# EAGLE board BRD1001-001-001-320 - Counting Registers (EAGLE 9.4.2)
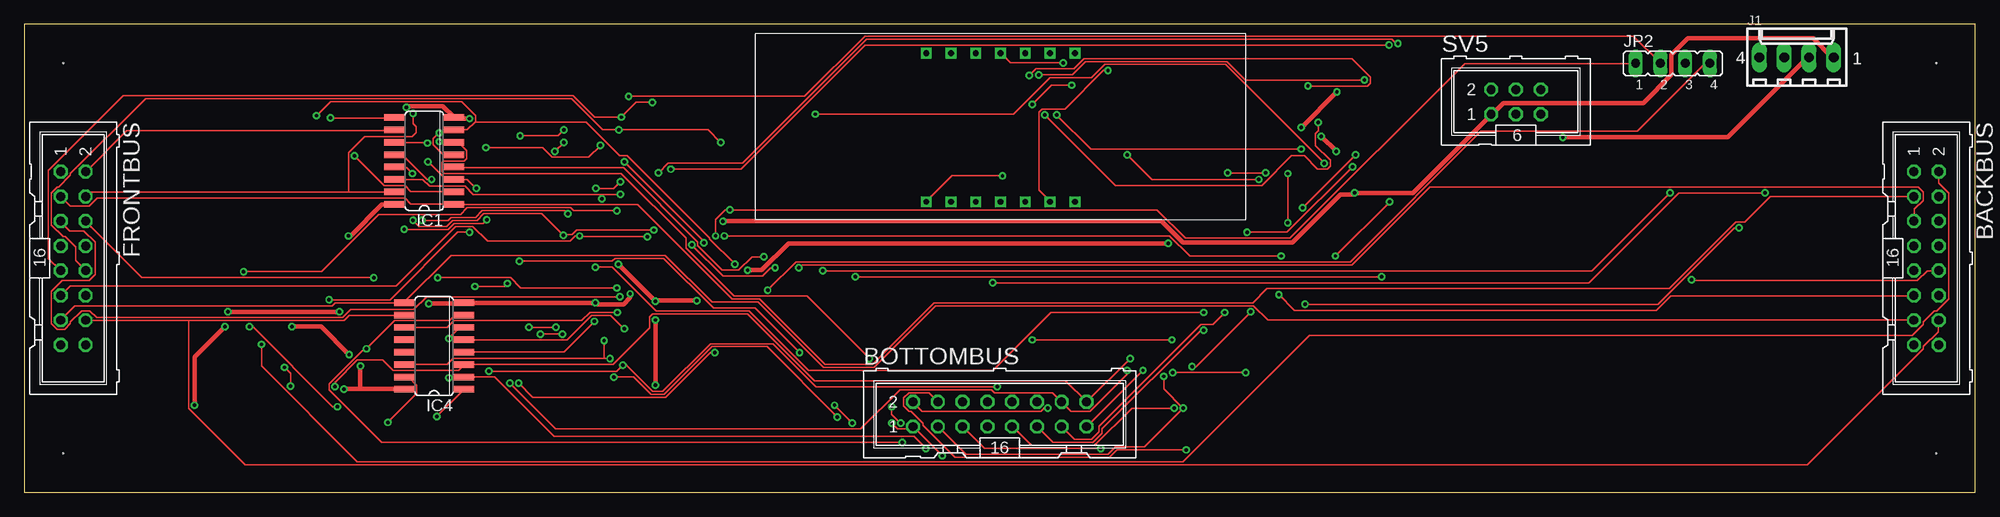
[diagram p0: board, top side]
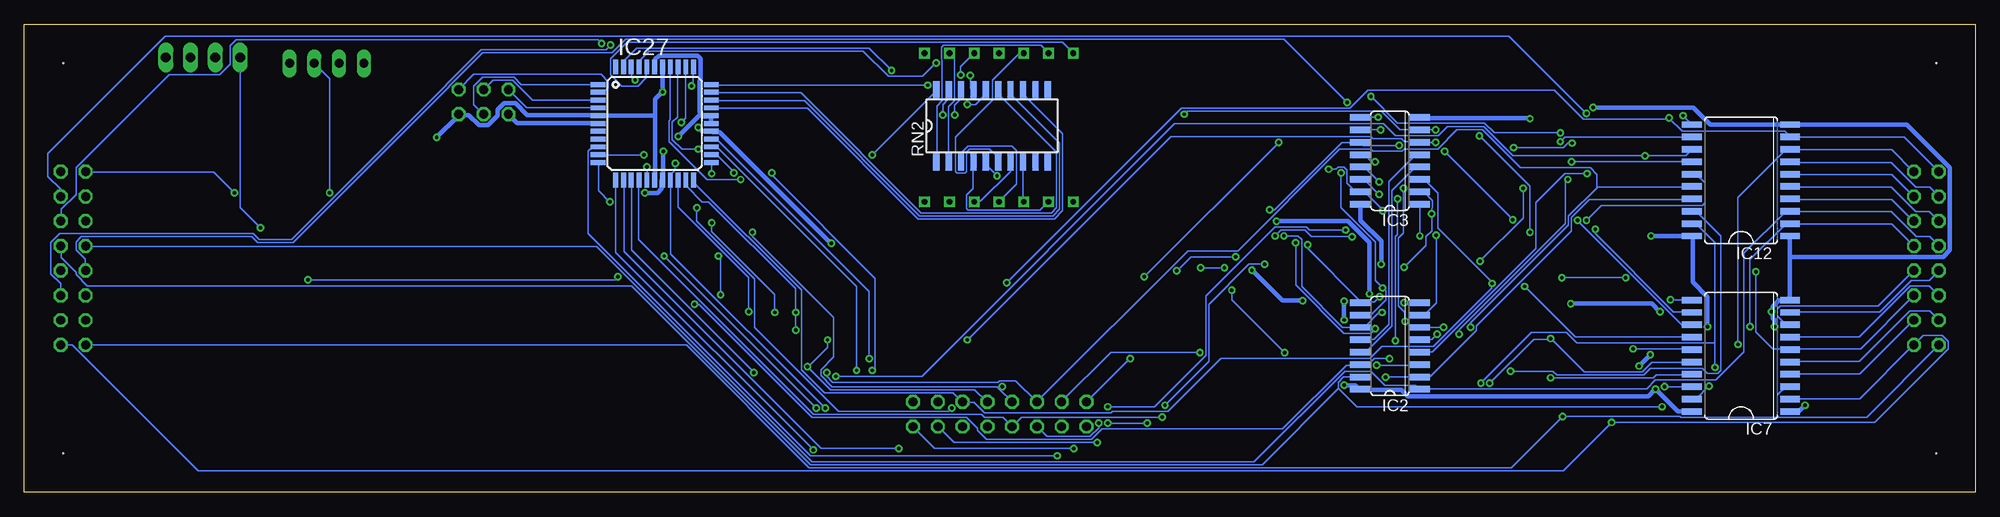
[diagram p1: board, bottom side, seen from below]

Size 200 x 48 mm. Coordinates in mm from the lower left corner, seen from the top.
Outline: 0,0 200,0 200,48 0,48 0,0
Copper layers (1*16): Top 0.035mm / dielectric 1.5mm / Bottom 0.035mm
Design rules "default": minimum track width 6mil, minimum drill 0.35mm, track to track 6mil, track to pad 6mil, pad to pad 6mil, via to via 6mil, smd to smd 6mil, copper to edge 40mil, drill to drill 6mil, minimum pad ring 10mil, minimum via ring 8mil, stop-mask expansion 4mil, vias tented up to drill 0mil, thermal gap 10mil
Net classes: 1 power: width 0.457 mm
Holes 0.12 mm at 4,4 196,44 4,44 196,4

## Footprints (pad centres in the part's own frame; a part is rotated, then mirrored left to right if it is on the bottom)
ML16 = drill 0.914 octagon: 1 -8.89,-1.27; 2 -8.89,1.27; 3 -6.35,-1.27; 4 -6.35,1.27; 5 -3.81,-1.27; 6 -3.81,1.27; 7 -1.27,-1.27; 8 -1.27,1.27; 9 1.27,-1.27; 10 1.27,1.27; 11 3.81,-1.27; 12 3.81,1.27; 13 6.35,-1.27; 14 6.35,1.27; 15 8.89,-1.27; 16 8.89,1.27
SO16 = smd 0.66 x 2.032: 1 -4.445,-3.073; 2 -3.175,-3.073; 3 -1.905,-3.073; 4 -0.635,-3.073; 5 0.635,-3.073; 6 1.905,-3.073; 7 3.175,-3.073; 8 4.445,-3.073; 9 4.445,3.073; 10 3.175,3.073; 11 1.905,3.073; 12 0.635,3.073; 13 -0.635,3.073; 14 -1.905,3.073; 15 -3.175,3.073; 16 -4.445,3.073
SO20W = smd 0.66 x 2.032: 1 -5.715,-5.029; 2 -4.445,-5.029; 3 -3.175,-5.029; 4 -1.905,-5.029; 5 -0.635,-5.029; 6 0.635,-5.029; 7 1.905,-5.029; 8 3.175,-5.029; 9 4.445,-5.029; 10 5.715,-5.029; 11 5.715,5.029; 12 4.445,5.029; 13 3.175,5.029; 14 1.905,5.029; 15 0.635,5.029; 16 -0.635,5.029; 17 -1.905,5.029; 18 -3.175,5.029; 19 -4.445,5.029; 20 -5.715,5.029
TQFP44 = smd 1.5 x 0.5: 1 -5.8,4; 2 -5.8,3.2; 3 -5.8,2.4; 4 -5.8,1.6; 5 -5.8,0.8; 6 -5.8,0; 7 -5.8,-0.8; 8 -5.8,-1.6; 9 -5.8,-2.4; 10 -5.8,-3.2; 11 -5.8,-4; 23 5.8,-4; 24 5.8,-3.2; 25 5.8,-2.4; 26 5.8,-1.6; 27 5.8,-0.8; 28 5.8,0; 29 5.8,0.8; 30 5.8,1.6; 31 5.8,2.4; 32 5.8,3.2; 33 5.8,4 | smd 0.5 x 1.5: 12 -4,-5.8; 13 -3.2,-5.8; 14 -2.4,-5.8; 15 -1.6,-5.8; 16 -0.8,-5.8; 17 0,-5.8; 18 0.8,-5.8; 19 1.6,-5.8; 20 2.4,-5.8; 21 3.2,-5.8; 22 4,-5.8; 34 4,5.8; 35 3.2,5.8; 36 2.4,5.8; 37 1.6,5.8; 38 0.8,5.8; 39 0,5.8; 40 -0.8,5.8; 41 -1.6,5.8; 42 -2.4,5.8; 43 -3.2,5.8; 44 -4,5.8
6410-04 = drill 1.016 long: 1 3.81,0; 2 1.27,0; 3 -1.27,0; 4 -3.81,0
JP4 = drill 0.914 long: 1 -3.81,0; 2 -1.27,0; 3 1.27,0; 4 3.81,0
SOMC20 = smd 1.91 x 0.64: 1 -3.62,5.715; 2 -3.62,4.445; 3 -3.62,3.175; 4 -3.62,1.905; 5 -3.62,0.635; 6 -3.62,-0.635; 7 -3.62,-1.905; 8 -3.62,-3.175; 9 -3.62,-4.445; 10 -3.62,-5.715; 11 3.62,-5.715; 12 3.62,-4.445; 13 3.62,-3.175; 14 3.62,-1.905; 15 3.62,-0.635; 16 3.62,0.635; 17 3.62,1.905; 18 3.62,3.175; 19 3.62,4.445; 20 3.62,5.715
ML6 = drill 0.914 octagon: 1 -2.54,-1.27; 2 -2.54,1.27; 3 0,-1.27; 4 0,1.27; 5 2.54,-1.27; 6 2.54,1.27
4-DIGIT-7-SEGMENT = drill 0.6 square: PIN1 17.48,1.88; PIN2 20.02,1.88; PIN3 22.56,1.88; PIN4 25.1,1.88; PIN5 27.64,1.88; PIN6 30.18,1.88; PIN7 32.72,1.88; PIN8 32.72,17.12; PIN9 30.18,17.12; PIN10 27.64,17.12; PIN11 25.1,17.12; PIN12 22.56,17.12; PIN13 20.02,17.12; PIN14 17.48,17.12

## Placement (x,y rotation side)
BACKBUS  [ML16]  195,24 270 top
BOTTOMBUS  [ML16]  100,8 0 top
FRONTBUS  [ML16]  5,24 270 top
IC1  74HC192D  [SO16]  41,34 90 top
IC2  74HC192D  [SO16]  60,15 90 bottom
IC3  74HC192D  [SO16]  60,34 90 bottom
IC4  74HC192D  [SO16]  42,15 90 top
IC7  74AC245DW  [SO20W]  24,14 90 bottom
IC12  74AC245DW  [SO20W]  24,32 90 bottom
IC27  MEGA8535-A  [TQFP44]  135.38,37.83 0 bottom
J1  22-27-2041-04  [6410-04]  181.7,44.61 0 top
JP2  [JP4]  169,44 0 top
RN2  [SOMC20]  100.79,37.59 90 bottom
SV5  [ML6]  152.92,40.05 0 top
U$1  4-DIGIT-7-SEGMENT  [4-DIGIT-7-SEGMENT]  74.98,27.92 0 top

## Library data of the parts
BACKBUS BOTTOMBUS FRONTBUS SV5 = con-harting-ml; OC_FARNELL: unknown; OC_NEWARK: unknown
IC1-IC4 IC7 IC12 = 74xx-eu
IC27 = atmel; MPN: ATMEGA8535-16AU; OC_FARNELL: 1528437; OC_NEWARK: 01M6908
J1 = con-molex; MF: MOLEX; OC_FARNELL: unknown; OC_NEWARK: unknown
JP2 = jumper
RN2 = resistor-dil; OC_FARNELL: unknown; OC_NEWARK: unknown
U$1 = ADAFRUIT

## Nets
!DEC: IC1.4 JP2.3
!INC: IC1.5 JP2.2
!REG_IN: IC1.11 IC2.11 IC3.11 IC4.11 JP2.1
!REG_OUT: IC7.19 IC12.19 JP2.4
A: IC27.37 RN2.20
B: IC27.36 RN2.19
BUS0: BACKBUS.1 FRONTBUS.1 IC1.9 IC12.9
BUS1: BACKBUS.2 FRONTBUS.2 IC1.10 IC12.8
BUS2: BACKBUS.3 FRONTBUS.3 IC1.1 IC12.7
BUS3: BACKBUS.4 FRONTBUS.4 IC1.15 IC12.6
BUS4: BACKBUS.5 FRONTBUS.5 IC2.9 IC12.5
BUS5: BACKBUS.6 FRONTBUS.6 IC2.10 IC12.4
BUS6: BACKBUS.7 FRONTBUS.7 IC2.1 IC12.3
BUS7: BACKBUS.8 FRONTBUS.8 IC2.15 IC12.2
BUS8: BACKBUS.9 FRONTBUS.9 IC3.9 IC7.9
BUS9: BACKBUS.10 FRONTBUS.10 IC3.10 IC7.8
BUS10: BACKBUS.11 FRONTBUS.11 IC3.1 IC7.7
BUS11: BACKBUS.12 FRONTBUS.12 IC3.15 IC7.6
BUS12: BACKBUS.13 FRONTBUS.13 IC4.9 IC7.5
BUS13: BACKBUS.14 FRONTBUS.14 IC4.10 IC7.4
BUS14: BACKBUS.15 FRONTBUS.15 IC4.1 IC7.3
BUS15: BACKBUS.16 FRONTBUS.16 IC4.15 IC7.2
C: IC27.35 RN2.18
CLEAR: IC1.14 IC2.14 IC3.14 IC4.14 J1.4
CLK: J1.3
D: IC27.34 RN2.17
DIG0: IC27.40 U$1.PIN14
DIG1: IC27.41 U$1.PIN11
DIG2: IC27.42 U$1.PIN10
DIG3: IC27.43 U$1.PIN6
DP: IC27.30 RN2.13
E: IC27.33 RN2.16
F: IC27.32 RN2.15
G: IC27.31 RN2.14
GND [power]: IC1.8 IC2.8 IC3.8 IC4.8 IC7.1 IC7.10 IC12.1 IC12.10 IC27.6 IC27.18 IC27.28 IC27.29 IC27.39 J1.1 SV5.1
N$1: IC4.13
N$2: IC1.12 IC2.5
N$3: IC1.13 IC2.4
N$4: IC2.12 IC3.5
N$5: IC2.13 IC3.4
N$6: IC3.12 IC4.5
N$7: IC3.13 IC4.4
N$18: IC27.1 SV5.3
N$19: IC27.3 SV5.4
N$20: IC27.2 SV5.6
N$21: IC27.4 SV5.2
N$24: RN2.1 U$1.PIN13
N$25: RN2.2 U$1.PIN9
N$26: RN2.3 U$1.PIN4
N$27: RN2.4 U$1.PIN2
N$28: RN2.5 U$1.PIN1
N$29: RN2.6 U$1.PIN12
N$30: RN2.7 U$1.PIN5
N$31: RN2.8 U$1.PIN3
SIGNAL0: BOTTOMBUS.1 IC1.7 IC12.11 IC27.9
SIGNAL1: BOTTOMBUS.2 IC1.6 IC12.12 IC27.10
SIGNAL2: BOTTOMBUS.3 IC1.2 IC12.13 IC27.11
SIGNAL3: BOTTOMBUS.4 IC1.3 IC12.14 IC27.12
SIGNAL4: BOTTOMBUS.5 IC2.7 IC12.15 IC27.13
SIGNAL5: BOTTOMBUS.6 IC2.6 IC12.16 IC27.14
SIGNAL6: BOTTOMBUS.7 IC2.2 IC12.17 IC27.15
SIGNAL7: BOTTOMBUS.8 IC2.3 IC12.18 IC27.16
SIGNAL8: BOTTOMBUS.9 IC3.7 IC7.11 IC27.19
SIGNAL9: BOTTOMBUS.10 IC3.6 IC7.12 IC27.20
SIGNAL10: BOTTOMBUS.11 IC3.2 IC7.13 IC27.21
SIGNAL11: BOTTOMBUS.12 IC3.3 IC7.14 IC27.22
SIGNAL12: BOTTOMBUS.13 IC4.7 IC7.15 IC27.23
SIGNAL13: BOTTOMBUS.14 IC4.6 IC7.16 IC27.24
SIGNAL14: BOTTOMBUS.15 IC4.2 IC7.17 IC27.25
SIGNAL15: BOTTOMBUS.16 IC4.3 IC7.18 IC27.26
VCC [power]: IC1.16 IC2.16 IC3.16 IC4.16 IC7.20 IC12.20 IC27.5 IC27.17 IC27.27 IC27.38 J1.2 SV5.5

## Tracks (layer width: path | path; a pad name or v marks a point on that pad's centre or on a via)
!DEC  (via drill 0.35)
  Top 0.152: v75.82,24.16 74.6,24.16 73.23,22.78 71.55,22.78 69.04,25.3 69.04,25.68 61.42,33.3 44.12,33.3 IC1.4 | v81.84,22.71 160.71,22.71 v168.71,30.71
  Bottom 0.152: v75.82,24.16 80.39,24.16 v81.84,22.71 | v168.71,30.71 168.71,42.44 170.23,43.97 JP2.3
!INC  (via drill 0.35)
  Top 0.152: v42.52,36.88 41.91,36.27 41.91,35.66 42.9,34.67 44.04,34.67 IC1.5 | v61.95,40.62 80.01,40.62 86.18,46.79 164.97,46.79 167.72,44.04 JP2.2
  Bottom 0.152: v42.52,36.88 49.3,36.88 50.29,37.87 59.21,37.87 v61.95,40.62
!REG_IN  (via drill 0.35)
  Top 0.152: v60.81,18.44 57.99,18.44 57.15,17.6 44.04,17.6 43.36,16.92 IC4.11 | v41.3,35.81 41.22,35.89 37.95,35.89 IC1.11 | v47.32,35.36 53.11,35.36 54.1,34.37 57.84,34.37 v59.05,35.59 | JP2.1 165.12,43.97 147.68,43.97 129.77,26.06 119.02,26.06 116.13,28.96 v72.31,28.96 71.86,28.96 70.87,27.96 v70.87,26.29
  Bottom 0.152: v60.81,18.44 61.11,18.44 62.64,16.92 63.02,16.92 IC2.11 63.09,16.92 64.85,16.92 69.04,21.11 69.04,25.91 69.42,26.29 v70.87,26.29 | v41.3,35.81 41.76,35.81 42.22,35.36 v47.32,35.36 | v59.05,35.59 62.71,35.59 63.02,35.89 IC3.11 63.09,35.89 64.92,35.89 71.86,28.96 v72.31,28.96
!REG_OUT  (via drill 0.35)
  Top 0.152: v27.28,10.9 27.28,12.19 v26.67,12.8 | v76.2,20.73 79.1,23.62 135.94,23.62 149.35,37.03 165.35,37.03 172.29,43.97 172.75,43.97 JP2.4 | v70.79,14.33 70.33,14.33 65.76,9.75 52.12,9.75 v50.67,11.2
  Bottom 0.152: v27.28,10.9 28.57,9.6 28.96,9.6 IC7.19 | 26.67,15.32 26.67,25.6 28.57,27.51 28.96,27.51 IC12.19 | 26.67,15.32 v26.67,12.8 | v76.2,20.73 76.2,19.74 v70.79,14.33 | v50.67,11.2 45.49,16.38 41.91,16.38 40.84,15.32 26.67,15.32
A  (via drill 0.35)
  Top 0.152: v126.57,32.08 115.59,32.08 v113.08,34.59
  Bottom 0.152: v126.57,32.08 130,32.08 133.88,35.97 133.88,38.1 133.81,38.18 133.81,43.59 IC27.37 | v113.08,34.59 106.53,41.15 RN2.20
B  (via drill 0.35)
  Top 0.152: v130.91,35.2 109.35,35.2 v105.84,38.71
  Bottom 0.152: v130.91,35.2 132.59,35.2 133.58,36.2 133.58,37.95 133.04,38.48 133.04,43.59 IC27.36 | v105.84,38.71 105.84,39.78 105.31,40.31 105.31,41.15 RN2.19
BUS0  (via drill 0.35)
  Top 0.152: v31.39,38.41 37.87,38.41 IC1.9 | v178.46,30.71 169.62,30.71 160.4,21.49 v99.29,21.49
  Bottom 0.152: FRONTBUS.1 3.73,32.92 7.24,36.42 18.9,36.42 IC12.9 18.97,36.5 19.51,37.03 30.02,37.03 v31.39,38.41 31.32,38.25 40.16,38.25 43.13,41.22 62.26,41.22 64.08,39.4 81.38,39.4 v99.29,21.49 | v178.46,30.71 180.59,32.84 193.7,32.84 BACKBUS.1
BUS1  (via drill 0.35)
  Top 0.152: IC1.10 37.87,37.11 10.52,37.11 6.33,32.92 FRONTBUS.2 | v24.31,15.16 24.31,12.95 34.14,3.12 118.8,3.12 131.75,16.08 193.55,16.08 194.69,17.22 194.69,17.45 195.83,18.59 196.06,18.59 197.28,19.81 197.28,30.71 196.29,31.7 196.29,32.84 BACKBUS.2
  Bottom 0.152: FRONTBUS.2 6.33,32.92 8.53,35.13 18.9,35.13 IC12.8 18.97,35.13 19.43,35.13 24.31,30.25 v24.31,15.16
BUS2
  Top 0.152: FRONTBUS.3 3.73,30.33 4.72,29.34 6.63,29.34 7.47,30.18 39.01,30.18 39.62,29.57 44.04,29.57 IC1.1 44.12,29.49 62.87,29.49 72.54,19.81 75.36,19.81 82.07,13.11 86.94,13.11 93.27,19.43 125.96,19.43 127.41,20.88 168.63,20.88 175.49,27.74 176.4,27.74 178.99,30.33 193.7,30.33 BACKBUS.3
  Bottom 0.152: IC12.7 18.9,33.83 8.61,33.83 6.1,31.32 4.65,31.32 3.73,30.4 FRONTBUS.3
BUS3  (via drill 0.35)
  Top 0.152: 33.22,30.79 6.71,30.79 6.33,30.4 FRONTBUS.4 | 33.22,30.79 37.87,30.79 IC1.15 | v39.85,38.86 39.85,37.8 40.16,37.49 40.16,36.88 39.78,36.5 34.9,36.5 33.22,34.82 33.22,30.79
  Bottom 0.152: IC12.6 18.9,32.61 8.53,32.61 6.33,30.4 FRONTBUS.4 | v39.85,38.86 47.78,46.79 185.55,46.79 197.59,34.75 197.59,32.38 196.29,31.09 196.29,30.4 BACKBUS.4
BUS4  (via drill 0.35)
  Top 0.152: v61.04,20.04 41.22,20.04 39.93,18.75 33.45,18.75 32.61,17.91 7.39,17.91 6.71,18.59 5.87,18.59 4.72,17.45 4.72,17.3 4.12,16.69 3.35,16.69 2.74,17.3 2.74,20.57 3.89,21.72 6.63,21.72 7.24,22.33 7.24,25.68 6.1,26.82 4.65,26.82 3.73,27.74 FRONTBUS.5 | v79.4,23.01 79.7,23.32 136.09,23.32 144.09,31.32 194.16,31.32 194.69,30.79 194.69,29.95 193.78,29.03 193.78,27.81 BACKBUS.5 | v76.96,23.01 76.5,23.01 75.67,22.17 71.63,22.17 v68.43,25.38
  Bottom 0.152: v61.04,20.04 61.57,19.51 63.02,19.51 IC2.9 63.02,19.58 68.43,24.99 v68.43,25.38 | IC12.5 18.9,31.32 8.61,31.32 6.1,28.8 4.72,28.8 FRONTBUS.5 | v76.96,23.01 v79.4,23.01
BUS5  (via drill 0.35)
  Top 0.152: v60.73,20.95 50.9,20.95 49.84,22.02 v42.37,22.02 | v35.81,22.02 12.04,22.02 6.33,27.74 FRONTBUS.6 | v140.82,46.02 140.66,46.02 140.21,46.48 86.33,46.48 73.61,33.76 65.99,33.76 v65,32.77
  Bottom 0.152: IC12.4 18.9,30.02 8.53,30.02 6.33,27.81 FRONTBUS.6 | v35.81,22.02 v42.37,22.02 | IC2.10 63.02,18.21 61.95,18.21 60.43,19.74 60.43,20.65 v60.73,20.95 61.49,21.72 61.49,25.68 65,29.18 v65,32.77 | v140.82,46.02 141.2,46.41 178.31,46.41 178.92,45.8 178.92,43.89 179.98,42.82 185.17,42.82 194.69,33.3 194.69,30.56 196.22,29.03 196.22,27.81 BACKBUS.6
BUS6
  Bottom 0.152: FRONTBUS.7 3.73,25.3 4.65,26.21 6.02,26.21 8.61,28.8 18.9,28.8 IC12.3 18.97,28.8 19.43,28.8 23.7,24.54 23.7,14.4 26.59,11.51 32.77,11.51 33.68,10.59 56.92,10.59 IC2.1 57,10.59 57.38,10.97 60.5,10.97 61.95,12.42 64.62,12.42 73.91,3.12 119.25,3.12 141.35,25.22 193.7,25.22 BACKBUS.7
BUS7  (via drill 0.35)
  Top 0.152: v32.08,8.76 31.62,8.76 23.39,16.99 v23.09,16.99
  Bottom 0.152: FRONTBUS.8 6.33,25.3 8.53,27.51 18.9,27.51 IC12.2 18.97,27.51 19.43,27.51 23.09,23.85 v23.09,16.99 | 65.27,10.63 63.4,8.76 v32.08,8.76 | 65.27,10.63 65.3,10.67 65.3,11.28 64.77,11.81 63.09,11.81 IC2.15 | 65.27,10.63 73.08,2.82 119.41,2.82 137.77,21.18 193.55,21.18 194.69,22.33 194.69,22.55 196.22,24.08 196.22,25.22 BACKBUS.8
BUS8  (via drill 0.35)
  Top 0.152: FRONTBUS.9 3.66,22.78 2.44,24 2.44,32.99 10.13,40.69 56.24,40.69 58.45,38.48 v61.19,38.48 62.71,40.01 v64.39,40.01
  Bottom 0.152: IC7.9 18.9,18.52 9.75,18.52 6.55,21.72 4.72,21.72 3.73,22.71 FRONTBUS.9 | v61.19,38.48 63.02,38.48 IC3.9 | v64.39,40.01 70.87,46.48 138.38,46.48 139.75,45.11 153.01,45.11 156.44,41.68 156.44,41.6 172.44,25.6 176.1,25.6 176.71,26.21 194.16,26.21 194.69,25.68 194.69,24.84 193.78,23.93 193.78,22.78 BACKBUS.9
BUS9  (via drill 0.35)
  Top 0.152: FRONTBUS.10 6.25,22.78 5.26,23.77 5.26,25.15 4.19,26.21 3.96,26.21 2.74,27.43 2.74,30.71 3.35,31.32 3.5,31.32 4.72,32.54 4.72,32.69 12.42,40.39 56.08,40.39 59.28,37.19 v60.96,37.19 70.1,37.19 v71.4,35.89 | v170.92,21.79 170.99,21.72 194.08,21.72 195.07,22.71 196.22,22.71 BACKBUS.10 | v85.19,22.1 v139.14,22.1
  Bottom 0.152: IC7.8 18.97,17.22 19.43,17.22 20.27,18.06 20.27,18.82 19.96,19.13 9.91,19.13 6.33,22.71 FRONTBUS.10 | v60.96,37.19 63.02,37.19 IC3.10 | v170.92,21.79 139.45,21.79 v139.14,22.1 | v71.4,35.89 v85.19,22.1
BUS10  (via drill 0.35)
  Top 0.152: FRONTBUS.11 4.72,21.18 38.1,21.18 44.2,27.28 45.95,27.28 47.47,25.76 55.93,25.76 56.46,26.29 v56.92,26.29 57,26.21 v63.86,26.21 | v128.63,20.27 130.23,18.67 167.34,18.67 168.78,20.12 193.7,20.12 BACKBUS.11 | v128.85,24.23 119.48,24.23 117.42,26.29 v71.78,26.29
  Bottom 0.152: IC7.7 18.9,15.93 11.89,15.93 6.63,21.18 4.72,21.18 FRONTBUS.11 | v56.92,26.29 56.92,29.49 IC3.1 | v128.63,20.27 128.63,24 v128.85,24.23 | v71.78,26.29 71.17,26.9 68.73,26.9 68.05,26.21 v63.86,26.21
BUS11  (via drill 0.35)
  Top 0.152: v60.73,28.88 56.31,28.88 56.01,29.18 45.41,29.18 44.73,28.5 36.35,28.5 30.48,22.63 v22.48,22.63 | v139.9,45.87 86.18,45.87 73.46,33.15 v66.29,33.15
  Bottom 0.152: FRONTBUS.12 6.33,20.12 11.73,14.71 18.9,14.71 IC7.6 18.97,14.71 20.73,14.71 22.48,16.46 v22.48,22.63 | v60.73,28.88 60.73,28.96 62.56,30.79 63.02,30.79 IC3.15 63.09,30.86 63.55,30.86 64.39,31.7 64.39,33.07 64.69,33.38 65.3,33.38 65.53,33.15 v66.29,33.15 | v139.9,45.87 140.36,45.41 153.16,45.41 156.74,41.83 156.74,41.76 172.59,25.91 175.95,25.91 176.56,26.52 196.37,26.52 197.28,25.6 197.28,22.4 196.29,21.41 196.29,20.19 BACKBUS.12
BUS12
  Top 0.152: FRONTBUS.13 3.73,17.68 5.18,19.13 31.55,19.13 31.85,19.43 38.86,19.43 IC4.9 38.94,19.51 43.74,24.31 65.68,24.31 70.48,19.51 75.21,19.51 81.92,12.8 87.1,12.8 93.42,19.13 126.03,19.13 127.48,17.68 193.7,17.68 BACKBUS.13
  Bottom 0.152: IC7.5 18.9,13.41 11.89,13.41 6.71,18.59 4.65,18.59 3.73,17.68 FRONTBUS.13
BUS13
  Top 0.152: 16.84,17.6 6.33,17.6 FRONTBUS.14 | 16.84,17.6 32.77,17.6 33.3,18.14 38.86,18.14 IC4.10 | 16.84,17.6 16.84,8.61 22.63,2.82 182.8,2.82 194.69,14.71 194.69,14.94 196.22,16.46 196.22,17.6 BACKBUS.14
  Bottom 0.152: IC7.4 18.9,12.12 11.81,12.12 6.33,17.6 FRONTBUS.14
BUS14  (via drill 0.35)
  Top 0.152: v42.29,7.77 45.03,10.52 IC4.1
  Bottom 0.152: 20.16,7.73 20.12,7.7 11.12,7.7 3.73,15.09 FRONTBUS.15 | 20.16,7.73 20.27,7.85 20.27,9.98 19.43,10.82 IC7.3 | 20.16,7.73 20.19,7.7 30.18,7.7 30.25,7.77 v42.29,7.77 47.55,2.52 119.56,2.52 132.13,15.09 193.7,15.09 BACKBUS.15
BUS15  (via drill 0.35)
  Top 0.152: v37.26,7.16 40.23,10.13 40.23,10.97 39.4,11.81 IC4.15
  Bottom 0.152: IC7.2 18.9,9.6 11.81,9.6 6.33,15.09 FRONTBUS.16 6.25,15.16 5.33,16.08 3.35,16.08 2.74,15.47 2.74,14.71 10.29,7.16 v37.26,7.16 42.22,2.21 182.19,2.21 195.07,15.09 196.22,15.09 BACKBUS.16
C  (via drill 0.35)
  Top 0.152: v132.66,37.95 132.66,37.11 132.36,36.8 132.36,35.59 133.88,34.06 133.88,33.45 133.58,33.15 132.59,33.15 131.22,34.52 129.92,34.52 126.87,31.47 111.86,31.47 v104.62,38.71
  Bottom 0.152: v132.66,37.95 132.21,38.41 132.21,43.59 IC27.35 | v104.62,38.71 104.62,39.7 104.01,40.31 104.01,41.15 RN2.18
CLEAR  (via drill 0.35)
  Top 0.152: v61.11,30.56 59.21,30.56 | 59.21,30.56 46.02,30.56 45.19,31.39 41.53,31.39 40.84,32.08 37.95,32.08 IC1.14 | v60.05,13.72 59.44,13.72 | 59.44,13.72 43.97,13.72 43.36,13.11 IC4.14 | v175.79,27.13 175.34,27.13 167.49,19.28 v131.29,19.28 | v59.21,30.1 59.21,30.56 | 59.44,13.72 v59.44,15.54
  Bottom 0.152: v61.11,30.56 62.64,32.08 63.02,32.08 IC3.14 | v60.05,13.72 61.57,13.72 62.18,13.11 63.02,13.11 IC2.14 63.09,13.03 64.47,13.03 71.02,6.48 89.53,6.48 90.6,5.41 101.35,5.41 102.26,6.33 102.26,6.55 103.4,7.7 119.25,7.7 130.84,19.28 v131.29,19.28 | v175.79,27.13 177.85,29.18 177.85,44.58 J1.4 | v59.21,30.1 59.21,26.44 59.44,26.21 v59.44,15.54
D  (via drill 0.35)
  Top 0.152: v131.6,41.68 137.69,41.68 138,41.99 138,42.6 136.09,44.5 108.66,44.5 107.59,43.43 103.71,43.43 v103.02,42.75
  Bottom 0.152: v131.6,41.68 131.44,41.83 131.44,43.59 IC27.34 | v103.02,42.75 103.02,41.53 102.72,41.22 RN2.17
DIG0
  Bottom 0.152: IC27.40 136.25,43.59 136.25,42.52 137.08,41.68 138.76,41.68 139.9,42.82 139.9,44.5 138.23,46.18 93.57,46.18 92.51,45.11 U$1.PIN14
DIG1  (via drill 0.35)
  Top 0.152: v106.53,44.04 101.12,44.04 100.13,45.03 U$1.PIN11
  Bottom 0.152: v106.53,44.04 107.9,42.67 111.4,42.67 114,45.26 135.94,45.26 136.93,44.27 136.93,43.66 IC27.41
DIG2  (via drill 0.35)
  Top 0.152: v137.39,42.29 125.2,42.29 123.29,44.2 108.81,44.2 107.44,42.82 v104.01,42.82
  Bottom 0.152: v137.39,42.29 137.77,42.67 137.77,43.59 IC27.42 | v104.01,42.82 104.01,43.66 102.64,45.03 U$1.PIN10
DIG3  (via drill 0.35)
  Top 0.152: v111.1,43.28 110.64,43.28 106.68,39.32 104.32,39.32 104.01,39.01 104.01,31.01 105.16,29.87 U$1.PIN6
  Bottom 0.152: v111.1,43.28 113.39,45.57 137.24,45.57 138.53,44.27 138.53,43.66 IC27.43
DP
  Bottom 0.152: IC27.30 129.54,39.4 119.71,39.4 108.36,28.04 94.41,28.04 93.57,28.88 93.57,36.8 97.61,40.84 97.61,41.15 RN2.13
E  (via drill 0.35)
  Top 0.152: v107.37,41.76 105.31,41.76 v103.33,39.78
  Bottom 0.152: v107.37,41.76 129.54,41.76 IC27.33 | v103.33,39.78 102.49,39.78 101.5,40.77 101.5,41.15 RN2.16
F
  Bottom 0.152: IC27.32 129.54,41 120.4,41 108.05,28.65 94.72,28.65 94.18,29.18 94.18,34.9 100.13,40.84 100.13,41.15 RN2.15
G
  Bottom 0.152: IC27.31 129.54,40.16 120.02,40.16 108.2,28.35 94.56,28.35 93.88,29.03 93.88,35.81 98.83,40.77 98.83,41.15 RN2.14
GND  (via drill 0.35)
  Top 0.457: J1.1 185.47,44.65 185.32,44.65 183.41,46.56 170.54,46.56 168.86,44.88 168.86,42.82 165.96,39.93 151.64,39.93 150.57,38.86 SV5.1 150.34,38.71 142.34,30.71 v136.4,30.71 136.25,30.56 134.95,30.56 130,25.6 118.8,25.6 116.59,27.81 v71.63,27.81 | v134.49,34.98 v132.97,36.5 | v39.17,39.47 39.32,39.47 39.47,39.62 42.9,39.62 44.04,38.48 IC1.8 44.27,38.33 v45.64,38.33 | v17.45,8.91 17.45,13.87 v20.57,16.99 | v41.45,19.36 44.88,19.36 IC4.8 45.11,19.43 v58.52,19.43 58.67,19.28 61.42,19.28 62.1,19.96 v62.1,20.34 | v20.88,18.52 v32.31,18.52
  Bottom 0.457: IC27.28 129.62,37.87 129.62,38.56 IC27.29 129.84,38.56 130.3,38.56 130.61,38.86 | 130.61,38.86 130.76,39.01 130.76,42.22 130.68,42.29 130.68,44.5 130.99,44.81 134.95,44.81 135.33,44.42 135.33,43.66 IC27.39 | v136.4,30.71 135.1,30.71 134.65,31.17 134.65,32 IC27.18 134.49,32.23 v134.49,34.98 | IC27.6 141.2,37.87 149.5,37.87 150.34,38.71 SV5.1 | v132.97,36.5 130.61,38.86 | v39.17,39.47 28.88,39.47 27.13,37.72 IC12.10 18.75,37.72 7.01,37.72 2.59,33.3 2.59,24.84 3.28,24.16 18.97,24.16 | v45.64,38.33 45.72,38.41 56.92,38.41 IC3.8 | v58.52,19.43 57,19.43 IC2.8 | v17.45,8.91 18.06,8.31 18.9,8.31 IC7.1 | v20.57,16.99 20.57,17.68 20.73,17.83 20.73,18.52 | 20.73,18.52 20.73,19.05 20.12,19.66 18.97,19.66 IC7.10 18.97,19.89 18.97,24.16 | 18.97,24.16 18.97,26.21 IC12.1 | v41.45,19.36 33.15,19.36 v32.31,18.52 | v20.88,18.52 20.73,18.52 | v71.63,27.81 64.31,27.81 62.1,25.6 v62.1,20.34
N$2  (via drill 0.35)
  Top 0.152: v52.88,16.23 v55.17,16.23 | v41.76,32.08 41.3,32.08 38.79,34.59 37.95,34.59 IC1.12
  Bottom 0.152: v55.17,16.23 55.7,15.7 56.92,15.7 IC2.5 | v52.88,16.23 52.88,16.69 41.99,27.58 41.99,31.85 v41.76,32.08
N$3  (via drill 0.35)
  Top 0.152: v39.78,32.69 39.17,33.3 37.95,33.3 IC1.13
  Bottom 0.152: v39.78,32.69 42.06,32.69 45.03,29.72 45.03,24.99 55.63,14.4 56.92,14.4 IC2.4
N$4
  Bottom 0.152: IC3.5 57,34.59 57.38,34.59 60.12,31.85 60.12,17.22 61.65,15.7 63.02,15.7 IC2.12
N$5
  Bottom 0.152: IC3.4 57,33.3 57.45,33.3 59.82,30.94 59.82,17.07 62.48,14.4 63.02,14.4 IC2.13
N$6  (via drill 0.35)
  Top 0.152: v61.49,16.76 60.12,18.14 58.14,18.14 55.63,15.62 45.11,15.62 IC4.5 | v69.65,25.6 69.65,25.76 v61.49,33.91
  Bottom 0.152: v61.49,16.76 61.95,16.31 64.69,16.31 69.65,21.26 v69.65,25.6 | v61.49,33.91 61.87,33.91 62.56,34.59 63.02,34.59 IC3.12
N$7  (via drill 0.35)
  Top 0.152: v58.45,17.53 55.32,14.4 45.11,14.4 IC4.4 | v58.6,31.17 60.43,31.17 v61.11,31.85
  Bottom 0.152: v58.45,17.53 58.45,18.44 59.13,19.13 59.13,26.06 58.6,26.59 v58.6,31.17 | v61.11,31.85 62.56,33.3 63.02,33.3 IC3.13
N$18
  Bottom 0.152: IC27.1 141.2,41.83 149.05,41.83 149.81,42.6 153.01,42.6 153.92,41.68 153.92,39.78 152.93,38.79 SV5.3
N$19
  Bottom 0.152: IC27.3 141.2,40.23 147.9,40.23 149.96,42.29 151.94,42.29 152.86,41.38 SV5.4
N$20
  Bottom 0.152: IC27.2 141.12,41.07 140.59,41.07 140.13,41.53 140.13,42.14 140.89,42.9 153.92,42.9 155.45,41.38 SV5.6
N$21
  Bottom 0.152: IC27.4 141.2,39.47 148.51,39.47 150.34,41.3 SV5.2
N$24
  Bottom 0.152: RN2.1 106.45,33.98 106.45,39.62 105.92,40.16 105.92,44.35 105.99,44.42 105.99,45.64 105.77,45.87 95.78,45.87 95.02,45.11 U$1.PIN13
N$25
  Bottom 0.152: RN2.2 105.23,33.98 105.23,39.55 104.62,40.16 104.62,44.5 U$1.PIN9
N$26
  Bottom 0.152: RN2.3 103.94,33.98 103.94,34.82 103.25,35.51 98.75,35.51 98.3,35.05 98.3,31.62 100.05,29.87 U$1.PIN4
N$27
  Bottom 0.152: RN2.4 102.72,33.91 102.72,31.17 103.4,30.48 103.4,29.11 103.25,28.96 95.86,28.96 95.02,29.79 U$1.PIN2
N$28  (via drill 0.35)
  Top 0.152: v100.28,32.46 95.1,32.46 92.51,29.87 U$1.PIN1
  Bottom 0.152: v100.28,32.46 101.42,33.6 101.42,33.91 RN2.5
N$29
  Bottom 0.152: RN2.6 100.2,33.98 100.2,34.37 101.04,35.2 103.1,35.2 103.4,34.9 103.4,32.92 103.56,32.77 104.39,32.77 104.55,32.92 104.55,36.42 100.74,40.23 100.74,42.29 97.99,45.03 97.61,45.03 U$1.PIN12
N$30
  Bottom 0.152: RN2.7 98.91,33.91 98.91,32.92 101.96,29.87 102.56,29.87 U$1.PIN5
N$31
  Bottom 0.152: RN2.8 97.61,33.91 97.61,29.87 U$1.PIN3
SIGNAL0  (via drill 0.35)
  Top 0.152: 46.22,37.99 46.25,38.02 46.25,38.63 44.81,40.08 31.39,40.08 v29.95,38.63 | 46.22,37.99 45.41,37.19 44.12,37.19 IC1.7 | v94.11,3.73 91.14,6.71 BOTTOMBUS.1 91.06,6.71 90.83,6.48 89.53,6.48 v88.92,7.09 | v72.85,23.39 70.26,25.98 70.26,26.06 61.8,34.52 61.04,34.52 57.61,37.95 46.25,37.95 46.22,37.99 | v84.89,7.09 v83.06,8.91
  Bottom 0.152: v29.95,38.63 IC12.11 | v94.11,3.73 119.41,3.73 142.19,26.52 142.19,34.98 141.81,35.36 141.2,35.36 IC27.9 | v72.85,23.39 74.45,23.39 78.56,19.28 78.56,13.41 v83.06,8.91 | v88.92,7.09 v84.89,7.09
SIGNAL1  (via drill 0.35)
  Top 0.152: v42.52,35.97 44.04,35.97 IC1.6 44.12,35.89 44.5,35.89 45.34,35.05 45.34,34.21 45.11,33.98 42.98,33.98 42.82,33.83 42.82,32.92 43.05,32.69 61.19,32.69 67.82,26.06 67.82,25.07 72.77,20.12 80.24,20.12 v86.64,13.72 | v131.06,29.18 v136.47,34.59 | v104.93,8.61 104.55,8.61 104.24,8.31 92.05,8.31 91.14,9.22 BOTTOMBUS.2
  Bottom 0.152: v42.52,35.97 42.06,36.42 29.03,36.42 IC12.12 | v136.47,34.59 141.12,34.59 IC27.10 | v131.06,29.18 131.06,27.81 125.12,21.87 125.12,16.92 116.51,8.31 105.23,8.31 v104.93,8.61 | v86.64,13.72 91.06,9.3 BOTTOMBUS.2
SIGNAL2  (via drill 0.35)
  Top 0.152: v33.83,34.52 36.88,31.47 39.01,31.47 39.62,30.86 44.04,30.86 IC1.2 | v134.42,24.23 v139.98,29.79 | BOTTOMBUS.3 93.73,6.71 96.55,3.89 111.1,3.89 111.86,4.65 114.83,4.65 v118.8,8.61 116.81,10.59 v116.81,11.89
  Bottom 0.152: IC12.13 29.03,35.13 29.64,34.52 v33.83,34.52 47.4,34.52 50.37,37.49 54.1,37.49 55.02,36.58 59.44,36.58 60.66,37.8 82.07,37.8 107.97,11.89 v116.81,11.89 | v139.98,29.79 141.12,30.94 141.12,33.76 IC27.11 | v118.8,8.61 v134.42,24.23
SIGNAL3  (via drill 0.35)
  Top 0.152: v41.38,33.91 43.13,32.16 44.04,32.16 IC1.3 44.12,32.08 45.41,32.08 v46.33,31.17 | v119.1,4.34 112.01,4.34 111.25,3.58 95.4,3.58 92.13,6.86 92.13,7.09 90.91,8.31 90.68,8.31 90.14,8.84 90.14,9.68 90.68,10.21 92.73,10.21 93.65,9.3 BOTTOMBUS.4 | v50.75,23.7 60.27,23.7 60.58,24 65.53,24 70.64,18.9 74.91,18.9 v79.48,14.33
  Bottom 0.152: v41.38,33.91 IC12.14 | v119.1,4.34 139.37,24.61 139.37,32 IC27.12 | v46.33,31.17 46.33,28.12 v50.75,23.7 | v79.48,14.33 88.62,14.33 93.65,9.3 BOTTOMBUS.4
SIGNAL4  (via drill 0.35)
  Top 0.152: v39.85,27.89 40.46,27.28 43.28,27.28 43.89,27.89 46.41,27.89 47.09,28.57 53.03,28.57 v55.24,26.36 55.24,26.44 56.16,26.44 56.62,26.9 v64.54,26.9 | v110.34,4.5 98.45,4.5 96.24,6.71 BOTTOMBUS.5 | v88.92,8.76 88.92,8 v89.84,7.09
  Bottom 0.152: v39.85,27.89 38.33,29.41 27.96,29.41 27.74,29.64 27.74,31.77 28.57,32.61 28.96,32.61 IC12.15 | v55.24,26.36 55.24,19.43 56.46,18.21 56.92,18.21 IC2.7 | v110.34,4.5 118.34,4.5 138.53,24.69 138.53,32 IC27.13 | v64.54,26.9 68.28,26.9 68.58,27.2 71.78,27.2 78.87,20.12 78.87,14.02 84.12,8.76 v88.92,8.76 | v89.84,7.09 89.84,6.63 90.75,5.71 95.17,5.71 96.16,6.71 BOTTOMBUS.5
SIGNAL5  (via drill 0.35)
  Top 0.152: v51.74,16.92 v54.48,16.92 | v117.73,12.27 v125.2,12.27
  Bottom 0.152: v54.48,16.92 IC2.6 | v51.74,16.92 51.74,17.37 41.68,27.43 41.68,28.35 38.75,31.28 | 38.75,31.28 38.71,31.32 29.03,31.32 IC12.16 | v125.2,12.27 137.77,24.84 137.77,32 IC27.14 | v117.73,12.27 117.73,11.89 117.12,11.28 100.2,11.28 100.05,11.43 98.37,11.43 96.24,9.3 BOTTOMBUS.6 96.16,9.3 80.7,24.77 75.59,24.77 65.15,35.2 61.95,35.2 61.72,34.98 58.75,34.98 58.52,35.2 55.09,35.2 53.11,37.19 50.52,37.19 46.63,33.3 39.47,33.3 38.79,32.61 38.79,31.32 38.75,31.28
SIGNAL6  (via drill 0.35)
  Top 0.152: v60.43,11.81 62.48,11.81 64.24,10.06 65.61,10.06 70.48,14.94 76.12,14.94 v83.36,7.7
  Bottom 0.152: IC12.17 29.03,30.02 39.55,30.02 41.38,28.19 41.38,26.82 51.13,17.07 51.13,16.61 55.85,11.89 56.92,11.89 IC2.2 57,11.81 v60.43,11.81 | IC27.15 137.01,32 137.01,25.91 119.1,8 101.88,8 101.58,7.7 99.67,7.7 98.75,6.78 BOTTOMBUS.7 98.68,6.78 97.77,7.7 v83.36,7.7
SIGNAL7  (via drill 0.35)
  Top 0.152: v136.17,33.38 129.46,26.67 v125.35,26.67 | v99.75,10.82 81.15,10.82 76.73,15.24 70.33,15.24 65.46,10.36 64.39,10.36 61.72,13.03 v61.34,13.03 60.73,12.42 v47.62,12.42
  Bottom 0.152: v136.17,33.38 136.17,32.08 IC27.16 | v125.35,26.67 125.35,26.21 117.04,17.91 117.04,13.87 118.34,12.57 118.34,11.96 117.2,10.82 100.28,10.82 100.01,10.55 | 100.01,10.55 98.75,9.3 BOTTOMBUS.8 | v61.34,13.03 57,13.03 IC2.3 | 100.01,10.55 v99.75,10.82 | v47.62,12.42 43.28,12.42 42.9,12.04 33.98,12.04 33.3,12.72 27.96,12.72 27.43,12.19 26.36,12.19 26.06,12.5 26.06,26.29 28.57,28.8 28.96,28.8 IC12.18
SIGNAL8  (via drill 0.35)
  Top 0.152: v31.24,19.74 37.49,19.74 44.42,26.67 v45.64,26.67 | v50.83,36.58 54.71,36.58 v55.32,37.19 | v117.88,8.61 113.54,8.61 109.73,4.8 103.25,4.8 101.35,6.71 BOTTOMBUS.9 | v81.08,38.79 101.42,38.79 105.16,42.52 109.42,42.52 110.8,43.89 123.14,43.89 v133.27,33.76
  Bottom 0.152: v31.24,19.74 29.03,19.74 IC7.11 | v45.64,26.67 45.64,31.39 v50.83,36.58 | v55.32,37.19 56.92,37.19 IC3.7 57,37.19 58.98,37.19 60.88,39.09 80.77,39.09 v81.08,38.79 | v117.88,8.61 133.73,24.46 133.73,32 IC27.19 133.73,32.08 133.73,32.61 133.27,33.07 v133.27,33.76
SIGNAL9  (via drill 0.35)
  Top 0.152: v38.94,26.98 43.43,26.98 44.04,27.58 47.02,27.58 v47.4,27.96 | v55.32,35.89 v54.41,34.98 | v125.73,18.52 120.09,12.88 v119.71,12.88 | v117.65,15.62 v103.33,15.62
  Bottom 0.152: v38.94,26.98 38.94,26.52 30.94,18.52 29.03,18.52 IC7.12 | v54.41,34.98 v47.4,27.96 | v55.32,35.89 56.92,35.89 IC3.6 57,35.97 58.52,35.97 58.83,36.27 61.72,36.27 61.95,36.5 82.45,36.5 v103.33,15.62 | v125.73,18.52 125.73,22.02 132.97,29.26 132.97,32 IC27.20 | BOTTOMBUS.10 101.35,9.3 102.56,10.52 117.35,10.52 v119.71,12.88 119.63,12.88 117.65,14.86 v117.65,15.62
SIGNAL10  (via drill 0.35)
  Top 0.152: v40.77,27.89 43.43,27.89 43.74,28.19 46.25,28.19 46.94,28.88 55.4,28.88 v55.7,28.57 | v120.93,16.61 120.62,16.61 110.49,6.48 110.49,6.02 109.58,5.11 105.46,5.11 103.86,6.71 BOTTOMBUS.11 | v58.52,23.09 60.27,23.09 64.77,18.59 74.3,18.59 80.39,12.5 99.29,12.5 105.23,18.44 v120.93,18.44
  Bottom 0.152: v40.77,27.89 30.1,17.22 29.03,17.22 IC7.13 | IC3.2 56.92,30.79 56.46,30.79 55.63,29.95 55.63,29.18 55.7,29.11 v55.7,28.57 55.7,26.82 56.31,26.21 56.31,25.3 v58.52,23.09 | v120.93,16.61 v120.93,18.44 120.93,20.88 129.84,29.79 130.53,29.79 132.13,31.39 132.13,32 IC27.21
SIGNAL11  (via drill 0.35)
  Top 0.152: v46.18,21.11 49.23,21.11 v49.53,21.41
  Bottom 0.152: v46.18,21.11 41,15.93 29.03,15.93 IC7.14 | IC3.3 56.46,32.08 55.09,30.71 55.09,27.13 49.53,21.57 v49.53,21.41 49.53,20.95 55.55,14.94 60.81,14.94 62.03,13.72 77.34,13.72 82.75,8.31 88.47,8.31 88.62,8.15 101.58,8.15 102.64,9.22 103.78,9.22 BOTTOMBUS.12 103.86,9.3 104.78,10.21 117.96,10.21 120.32,12.57 120.32,20.73 131.37,31.77 131.37,32 IC27.22
SIGNAL12  (via drill 0.35)
  Top 0.152: IC4.7 45.03,18.14 44.12,18.14 43.59,17.6 37.95,17.6 v35.05,14.71 34.82,14.71 31.24,11.12 31.24,10.52 36.65,5.11 v89.99,5.11 | v129.54,27.66 v129.54,32.69 | v123.06,18.44 121.84,17.22 120.62,17.22 110.19,6.78 110.19,6.17 109.42,5.41 107.67,5.41 106.38,6.71 BOTTOMBUS.13
  Bottom 0.152: v35.05,14.71 29.03,14.71 IC7.15 | v129.54,32.69 129.54,33.76 IC27.23 | v129.54,27.66 129.54,26.75 123.06,20.27 v123.06,18.44 | v89.99,5.11 104.7,5.11 106.3,6.71 BOTTOMBUS.13
SIGNAL13  (via drill 0.35)
  Top 0.152: v43.51,15.77 44.58,16.84 45.03,16.84 IC4.6 | v123.37,32.77 v127.25,32.77 | v113.08,12.5 113.08,12.12 109.27,8.31 107.29,8.31 106.38,9.22 BOTTOMBUS.14 106.3,9.3 105.39,10.21 99.44,10.21 99.14,10.52 89.76,10.52 85.72,6.48 54.48,6.48 v49.76,11.2
  Bottom 0.152: IC7.16 29.03,13.34 33.15,13.34 34.14,12.34 40.08,12.34 v43.51,15.77 43.51,15.7 45.26,15.7 v49.76,11.2 | v127.25,32.77 127.25,32.84 129.01,34.59 129.54,34.59 IC27.24 | v123.37,32.77 123.37,32.54 112.78,21.95 112.78,12.8 v113.08,12.5
SIGNAL14  (via drill 0.35)
  Top 0.152: v43.51,11.73 43.59,11.81 45.03,11.81 IC4.2 45.11,11.81 48.23,11.81 54.33,5.71 91.21,5.71 v92.43,4.5 | v114.68,12.5 108.97,6.78 BOTTOMBUS.15
  Bottom 0.152: v43.51,11.73 32.99,11.73 32.69,12.04 29.03,12.04 IC7.17 | v114.68,12.5 114.68,21.11 128.93,35.36 129.54,35.36 IC27.25 | v92.43,4.5 106.68,4.5 108.89,6.71 BOTTOMBUS.15
SIGNAL15  (via drill 0.35)
  Top 0.152: v31.85,10.82 31.85,11.28 34.14,13.56 36.73,13.56 37.8,12.5 44.5,12.5 45.03,13.03 IC4.3 45.11,13.11 60.35,13.11 64.08,16.84 64.08,17.98 64.39,18.29 74.14,18.29 81,11.43 106.76,11.43 108.89,9.3 BOTTOMBUS.16 108.97,9.3 v113.39,13.72
  Bottom 0.152: v31.85,10.82 IC7.18 | v113.39,13.72 113.39,20.57 129.01,36.2 129.54,36.2 IC27.26
VCC  (via drill 0.35)
  Top 0.457: v33.22,26.29 33.45,26.29 36.65,29.49 37.87,29.49 IC1.16 | 34.44,10.59 38.86,10.59 IC4.16 | 34.44,10.59 v32.77,10.59 | v60.88,23.39 v64.69,19.58 64.85,19.66 v68.96,19.66 | v64.69,10.97 v64.69,17.68 | v27.43,16.99 30.4,16.99 v33.3,14.1 | 34.44,10.59 v34.44,12.95 | v134.57,41.07 v130.91,37.41 | v157.73,36.42 174.65,36.42 182.8,44.58 182.96,44.58 J1.2 | v74.14,22.78 75.59,22.78 78.33,25.53 v117.27,25.53
  Bottom 0.457: v33.22,26.29 IC12.20 28.96,26.06 28.96,21.57 27.43,20.04 v27.43,16.99 | IC7.20 29.03,8.31 30.48,8.31 v32.77,10.59 33.53,9.83 58.14,9.83 58.83,10.52 63.02,10.52 IC2.16 63.25,10.67 63.55,10.97 v64.69,10.97 | v60.88,23.39 60.88,25.76 63.02,27.89 63.02,29.49 IC3.16 | v64.69,17.68 v64.69,19.58 | v34.44,12.95 v33.3,14.1 | v130.91,37.41 130.53,37.03 129.62,37.03 IC27.27 129.39,36.96 128.7,36.96 v117.27,25.53 | IC27.38 134.57,43.59 v134.57,41.07 135.33,40.31 135.33,38.63 | 135.33,38.63 135.33,32.08 IC27.17 | 135.33,38.63 141.12,38.63 IC27.5 141.35,38.71 148.44,38.71 149.66,39.93 150.8,39.93 151.49,39.24 151.49,38.63 152.48,37.64 153.39,37.64 154.46,38.71 155.45,38.71 SV5.5 155.6,38.56 v157.73,36.42 | v68.96,19.66 71.02,19.66 v74.14,22.78